# Altium PCB STM32_BareBones.PcbDoc
Units mil, origin at the board's own origin, x right, y up, seen from the top; angles counter-clockwise.
Board outline 870 x 1180 mil, 2 copper layers (Top Layer, Bottom Layer), stack 61.756 mil thick; 19 components, 33 nets, 111 pads, 0 vias.
Unrouted connection lines stored in the file: 54.
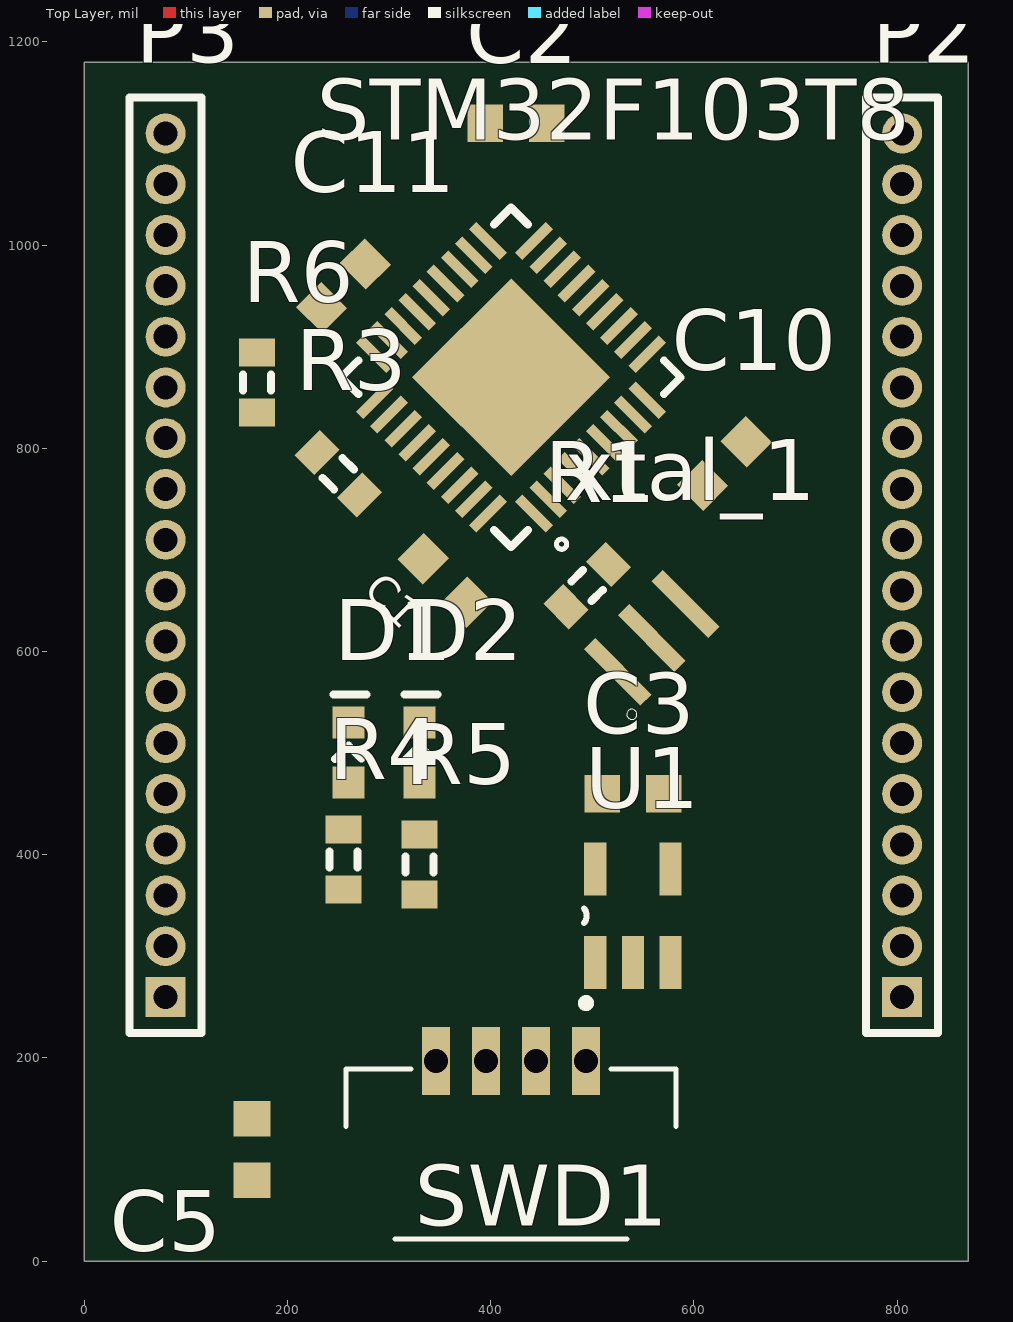
[diagram p0: Top Layer view]
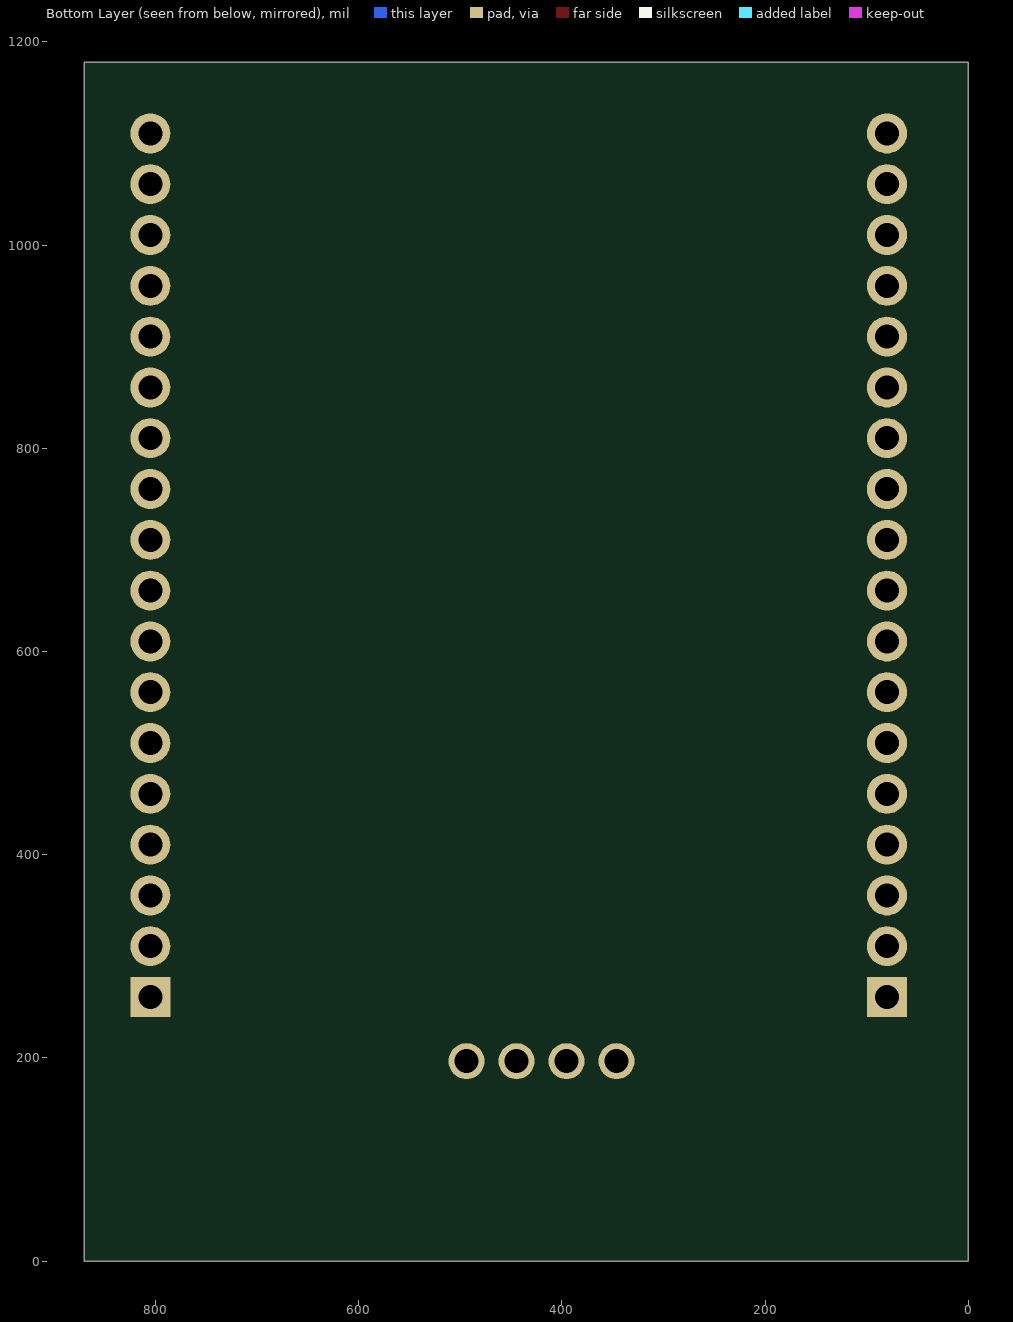
[diagram p1: Bottom Layer view, seen from below]

## Layer stack, top to bottom
Top Solder: solder mask 1, SM-001, Dk 4
Top Layer: signal copper 1.378
Dielectric 1: core 59, Core-043, Dk 4.3
Bottom Layer: signal copper 1.378
Bottom Solder: solder mask 1, SM-001, Dk 4

## Board outline
0,0 870,0 870,1180 0,1180

## Design rules (kind name [scope] priority, off if disabled: settings)
Clearance [All] p1: gap=0 ignorepadtopadclearanceinfootprint=TRUE
PolygonConnect [All] p1: connectstyle=Relief reliefconductorwidth=10 reliefentries=4 polygonreliefangle="90 Angle" airgapwidth=10
RoutingVias [All] p1: holewidth=28 width=50 viastyle="Through Hole" minholewidth=28 minwidth=50 maxholewidth=28 maxwidth=50
SolderMaskExpansion [All] p1: expansion=4 istentingtop=FALSE
Width [All] p1: maxlimit=10 minlimit=10 preferedwidth=10
30 further rules are at their usual default settings.

## Components (designator, comment, footprint, x,y, rotation, side; value= is the part's Value field where it differs from the comment)
C1 "Cap" CAPC1608X90N 355,670 r315 top value=0.1µF
C2 "Cap" CAPC1608X90N 425,1120 r180 top value=0.1µF
C3 "Cap" CAPC1608X90N 540,460 r180 top value=2.2µF
C5 "Cap" CAPC1608X90N 165,110 r270 top value=0.1µF
C10 "Cap" CAPC1608X90N 630,785 r225 top value=0.1µF
C11 "Cap" CAPC1608X90N 255,960 r225 top value=0.1µF
D1 "LED-RED" *LEDM1608X80_LTE-C1906R-14(Primary) 260,500.47 r270 top
D2 "LED-BLUE" *LEDM1608X80_LTE-C1906R-14(Primary) 330,500.47 r270 top
P2 "MHDR1X18" MHDR1X18 805,260 r90 top
P3 "MHDR1X18" MHDR1X18 80,260 r90 top
R1 "RC0603FR-101KL" J1-0603 495,665 r225 top value=1M
R3 "RC0603FR-101KL" J1-0603 250,775 r135 top value=4.7k
R4 "RC0603FR-101KL" J1-0603 255,395.47 r270 top value=470
R5 "RC0603FR-101KL" J1-0603 330,390.47 r270 top value=470
R6 "RC0603FR-101KL" J1-0603 170,865 r270 top value=4.7k
STM32F103T8 "STM32_Microcontroller" *QFN50P600X600X100-37N 420,870 r135 top
SWD1 "SWD Connector" JST_BM04B-GHS-holes 420,65 r0 top
U1 "SPX3819M5-L-3-3/TR" *SOT95P280X145-5N 540,340 r90 top value=3V3
xtal_1 "8MHz Resinator" *OSC_CSTCE8M00G55-R0 558.41,613.41 r45 top

## Footprints (in the part's own frame and the unit in brackets; to place one, negate y for a bottom-side part, rotate by r counter-clockwise, add the part's x,y. Pads: shape width x height; smd on the part's side, far side on the other; paste and mask are expansions set on the pad)
*LEDM1608X80_LTE-C1906R-14(Primary) [mm]
  rect 0.8x0.8 smd: A(0.75,0) C(-0.75,0)
  silkscreen extent -1.45,-0.38 0.16,0.45, body extent -0.8,-0.3 0.8,0.3, height 1.15
*OSC_CSTCE8M00G55-R0 [mm]
  rect 0.4x2 smd: 1(-1.2,0) 2(0,0) 3(1.2,0)
  silkscreen extent -1.83,-1.13 -1.57,-0.87, body extent -1.6,-0.65 1.6,0.65, height 1
*QFN50P600X600X100-37N [mm]
  rect 1.08x0.26 smd: 1(-2.815,2) 2(-2.815,1.5) 3(-2.815,1) 4(-2.815,0.5) 5(-2.815,0) 6(-2.815,-0.5) 7(-2.815,-1) 8(-2.815,-1.5) 9(-2.815,-2) 19(2.815,-2) 20(2.815,-1.5) 21(2.815,-1) 22(2.815,-0.5) 23(2.815,0) 24(2.815,0.5) 25(2.815,1) 26(2.815,1.5) 27(2.815,2)
  rect 0.26x1.08 smd: 10(-2,-2.815) 11(-1.5,-2.815) 12(-1,-2.815) 13(-0.5,-2.815) 14(0,-2.815) 15(0.5,-2.815) 16(1,-2.815) 17(1.5,-2.815) 18(2,-2.815) 28(2,2.815) 29(1.5,2.815) 30(1,2.815) 31(0.5,2.815) 32(0,2.815) 33(-0.5,2.815) 34(-1,2.815) 35(-1.5,2.815) 36(-2,2.815)
  rect 3.5x3.5 smd: 36(0,0)
  silkscreen extent -3.97,-3 3,3, body extent -3,-3 3,3, height 1
*SOT95P280X145-5N [mil]
  rect 52x22 smd: 1(-46,37) 2(-46,0) 3(-46,-37) 4(46,-37) 5(46,37)
  silkscreen extent -7,46 7,48, body extent -55,-57 55,57, height 57
CAPC1608X90N [mm]
  rect 0.89x0.93 smd: 1(-0.77,0) 2(0.77,0)
  body extent -0.8,-0.4 0.8,0.4, height 0.9
J1-0603 [mm] "Chip Resistor, Body 1.6x0.8mm, IPC High Density"
  rect 0.7x0.9 smd: 1(-0.75,0) 2(0.75,0)
  silkscreen extent -0.2,-0.35 0.2,0.35, body extent -0.85,-0.47 0.85,0.47, height 0.9
JST_BM04B-GHS-holes [mm]
  rect 0.7x1.7 / inner rect 0.6x1.7 / far side round 0.9 hole 0.6: 1(1.875,3.35) 2(0.625,3.35) 3(-0.625,3.35) 4(-1.875,3.35)
  silkscreen extent -4.13,-1.1 4.13,4.9, body extent -4.12,-1.02 4.12,3.93, height 4.15
MHDR1X18 [mm] "Connector; Header; 18 Position"
  rect 1x1 hole 0.6: 1(0,0)
  round 1 hole 0.6: 2(1.27,0) 3(2.54,0) 4(3.81,0) 5(5.08,0) 6(6.35,0) 7(7.62,0) 8(8.89,0) 9(10.16,0) 10(11.43,0) 11(12.7,0) 12(13.97,0) 13(15.24,0) 14(16.51,0) 15(17.78,0) 16(19.05,0) 17(20.32,0) 18(21.59,0)
  silkscreen extent -0.9,-0.9 22.49,0.9

## Part data
C1 C2 C3 C5 C10 C11: library part C1608X7R1H474K080AC, "0.47µF ±10% 50V Ceramic Capacitor X7R 0603 _1608 Metric_", Package="0603 (1608) TDK", Availability=Unavailable, ChipDip_Link=https://www.chipdip.ru/product0/8576565346, MF=TDK, MP=C1608X7R1H474K080AC, Price=None, SnapEDA_Link=https://www.snapeda.com/parts/C1608X7R1H474K080AC/TDK/view-part/360155/?ref=snap
D1: library part 0603-LED-RED, "Red 620nm LED Indication - Discrete 2.2V 0603 (1608 Metric)", Package="0603 Lite-On", MP="LTST-C194KRKT or SML-D12U1WT86", SnapEDA_Link=https://www.snapeda.com/parts/LTE-C1906R-14/Lite-On%20Inc./view-part/?ref=snap, Type=SMD
D2: library part 0603-LED-BLUE, "LED IrLED Chip LED 2-Pin SMD T/R", Package="0603 Lite-On", MP="LTST-S270TBKT or  LTST-C194TBKT or LTST-C191TBKT or  SML-D12D1WT86", SnapEDA_Link=https://www.snapeda.com/parts/LTE-C1906R-14/Lite-On%20Inc./view-part/?ref=snap, Type=SMD
P2 P3: "Header, 18-Pin", LatestRevisionDate=17-Jul-2002, LatestRevisionNote="Re-released for DXP Platform.", Publisher="Altium Limited"
R1 R3 R4 R5 R6: "1 kOhms ±1% 0.1W, 1/10W Chip Resistor 0603 (1608 Metric) Moisture Resistant Thick Film", Package=R0603, MF="Yageo or NXP", MP=RC0603FR-101KL, Pacage Metric=1608, SnapEDA_Link=https://www.snapeda.com/parts/RC0603FR-101KL/Yageo/view-part/?ref=search&t=RC0603FR-07%201k, Type=SMD
STM32F103T8: library part STM32F103T8, "STM32F103T8U6, Microcontroller 32BIT ARM 64K FLASH [VFQFPN-36]", Package=VFQFPN-36, ChipDip_Link=https://www.chipdip.ru/product/stm32f103t8u6-2, HelpURL=http://www.st.com/stonline/products/literature/ds/13587.pdf, MF=STM, MP=STM32F103T8U6, SnapEDA_Link=https://www.snapeda.com/parts/STM32F103T8U6TR/STMicroelectronics/view-part/?ref=search&t=STM32F103T8U6, Type=SMD
SWD1: library part "SWD SM04B-GHS-TB(LF)(SN)-", "Conn Shrouded Header HDR 4 POS 1.25mm Solder ST SMD Reel", Package=None, Instructions="Do not install", MF="JST Sales", MP=SM04B-GHS-TB(LF)(SN), SnapEDA_Link=https://www.snapeda.com/parts/BM04B-GHS-TBT%28LF%29%28SN%29%28N%29/JST%20Sales%20America%20Inc./view-part/?ref=snap, System=Connector, Type=SMD
U1: "Low Dropout Voltage Regulator, Adjustable 0.5A, В±1%, 2.5 to 16 Vin, 5-Pin SOT-23", Package="SOT-23-5 Exar", ChipDip_Link=https://www.chipdip.ru/product1/8003455237, HelpURL=http://www.farnell.com/datasheets/2614478.pdf, MF="MaxLinear, Inc.", MP=SPX3819M5-L-3-3/TR, SnapEDA_Link=https://www.snapeda.com/parts/SPX3819M5-L/MaxLinear%2C%20Inc./view-part/?ref=snap, Type=SMD
xtal_1: library part CSTCE8M00G55-R0, "Ceramic Resonator 8MHz ??0.5% _Tol_ ??0.2% _Stability_ 33pF 40Ohm 3-Pin CSMD T/R", Package="SMD-3 Murata", ChipDip_Link=https://www.chipdip.ru/product1/8001783721, HelpURL=https://www.murata.com/en-eu/api/pdfdownloadapi?cate=&partno=CSTCE8M00G55-R0, MF=Murata, MP=CSTCE8M00G55-R0, SnapEDA_Link=https://www.snapeda.com/parts/CSTCE8M00G55-R0/Murata%20Electronics%20North%20America/view-part/?ref=snap, Type=SMD

## Nets (pads, with @x,y where several pads share a name; then routed paths per layer and width w, separated by ;. In a path a pad name is that pad's centre, name@x,y a point inside that pad or via, vN(x,y) a via of type N, cw(c..) or ccw(c..) an arc to the next point about the centre after c; other vN are vias at no path point)
BOOT0: P3.2 STM32F103T8.35
GND: C1.1 C2.1 C3.1 C5.1 C10.2 C11.1 D2.C P2.5 P2.18 P3.1 P3.11 R3.1 STM32F103T8.5 STM32F103T8.18 STM32F103T8.26 STM32F103T8.36 SWD1.4 U1.2 xtal_1.2
NetD1_A: D1.A R4.1
NetD2_A: D2.A R5.1
OSCIN: P2.2 R1.2 STM32F103T8.2 xtal_1.1
OSCOUT: P2.3 R1.1 STM32F103T8.3 xtal_1.3
PA0: P2.7 STM32F103T8.7
PA1: P2.8 STM32F103T8.8
PA2: P2.9 STM32F103T8.9
PA3: P2.10 STM32F103T8.10
PA4: P2.11 STM32F103T8.11
PA5: P2.12 STM32F103T8.12
PA6: P2.13 STM32F103T8.13
PA7: P2.14 STM32F103T8.14
PA8: P3.17 STM32F103T8.20
PA9: P3.16 STM32F103T8.21
PA10: P3.15 STM32F103T8.22
PA11: P3.14 STM32F103T8.23
PA12: P3.13 STM32F103T8.24
PA15: P3.8 STM32F103T8.29
PB0: P2.15 STM32F103T8.15
PB1: P2.16 STM32F103T8.16
PB2: P2.17 STM32F103T8.17
PB3: P3.7 STM32F103T8.30
PB4: P3.6 STM32F103T8.31
PB5: P3.5 STM32F103T8.32
PB6: D1.C P3.4 STM32F103T8.33
PB7: P3.3 STM32F103T8.34
RESET: P2.4 STM32F103T8.4
SWCLK: P3.9 R3.2 STM32F103T8.28 SWD1.3
SWDIO: P3.12 R6.2 STM32F103T8.25 SWD1.2
VCC: C5.2 R6.1 SWD1.1 U1.1 U1.3
VCC3V3: C1.2 C2.2 C3.2 C10.1 C11.2 P2.1 P2.6 P3.10 P3.18 R4.2 R5.2 STM32F103T8.1 STM32F103T8.6 STM32F103T8.19 STM32F103T8.27 U1.5
pads on no net: U1.4